# Altium PCB Sensor_Box_CAN_Shutter_CTRL_STM.PCBDOC
Units mm, origin at the board's own origin, x right, y up, seen from the top; angles counter-clockwise.
Board outline 38 x 35.75 mm, 2 copper layers (Top, Bot), stack 1.571 mm thick; 78 components, 56 nets, 242 pads, 101 vias.
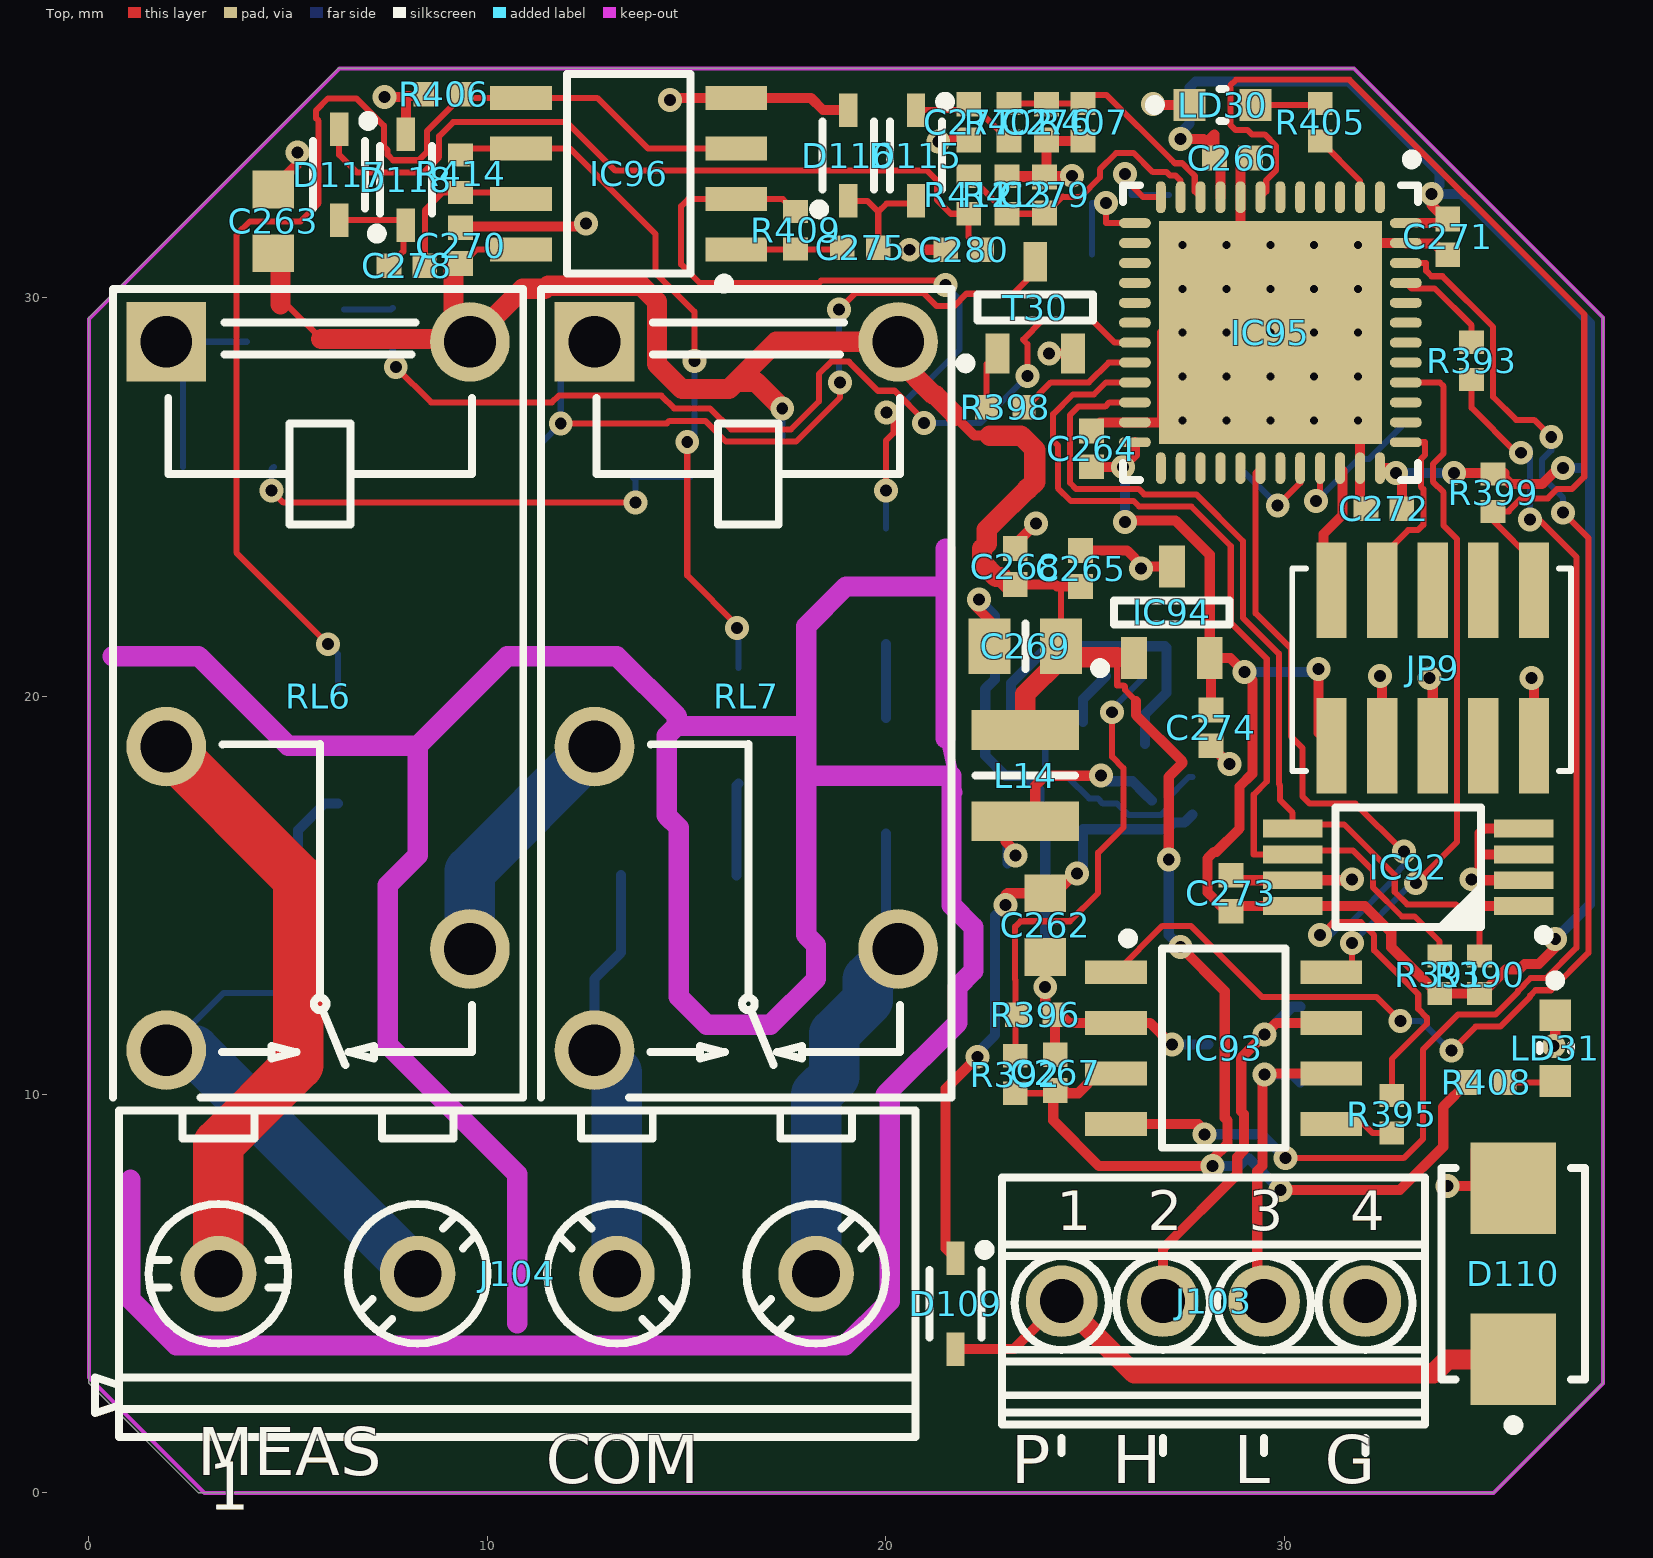
[diagram p0: Top view]
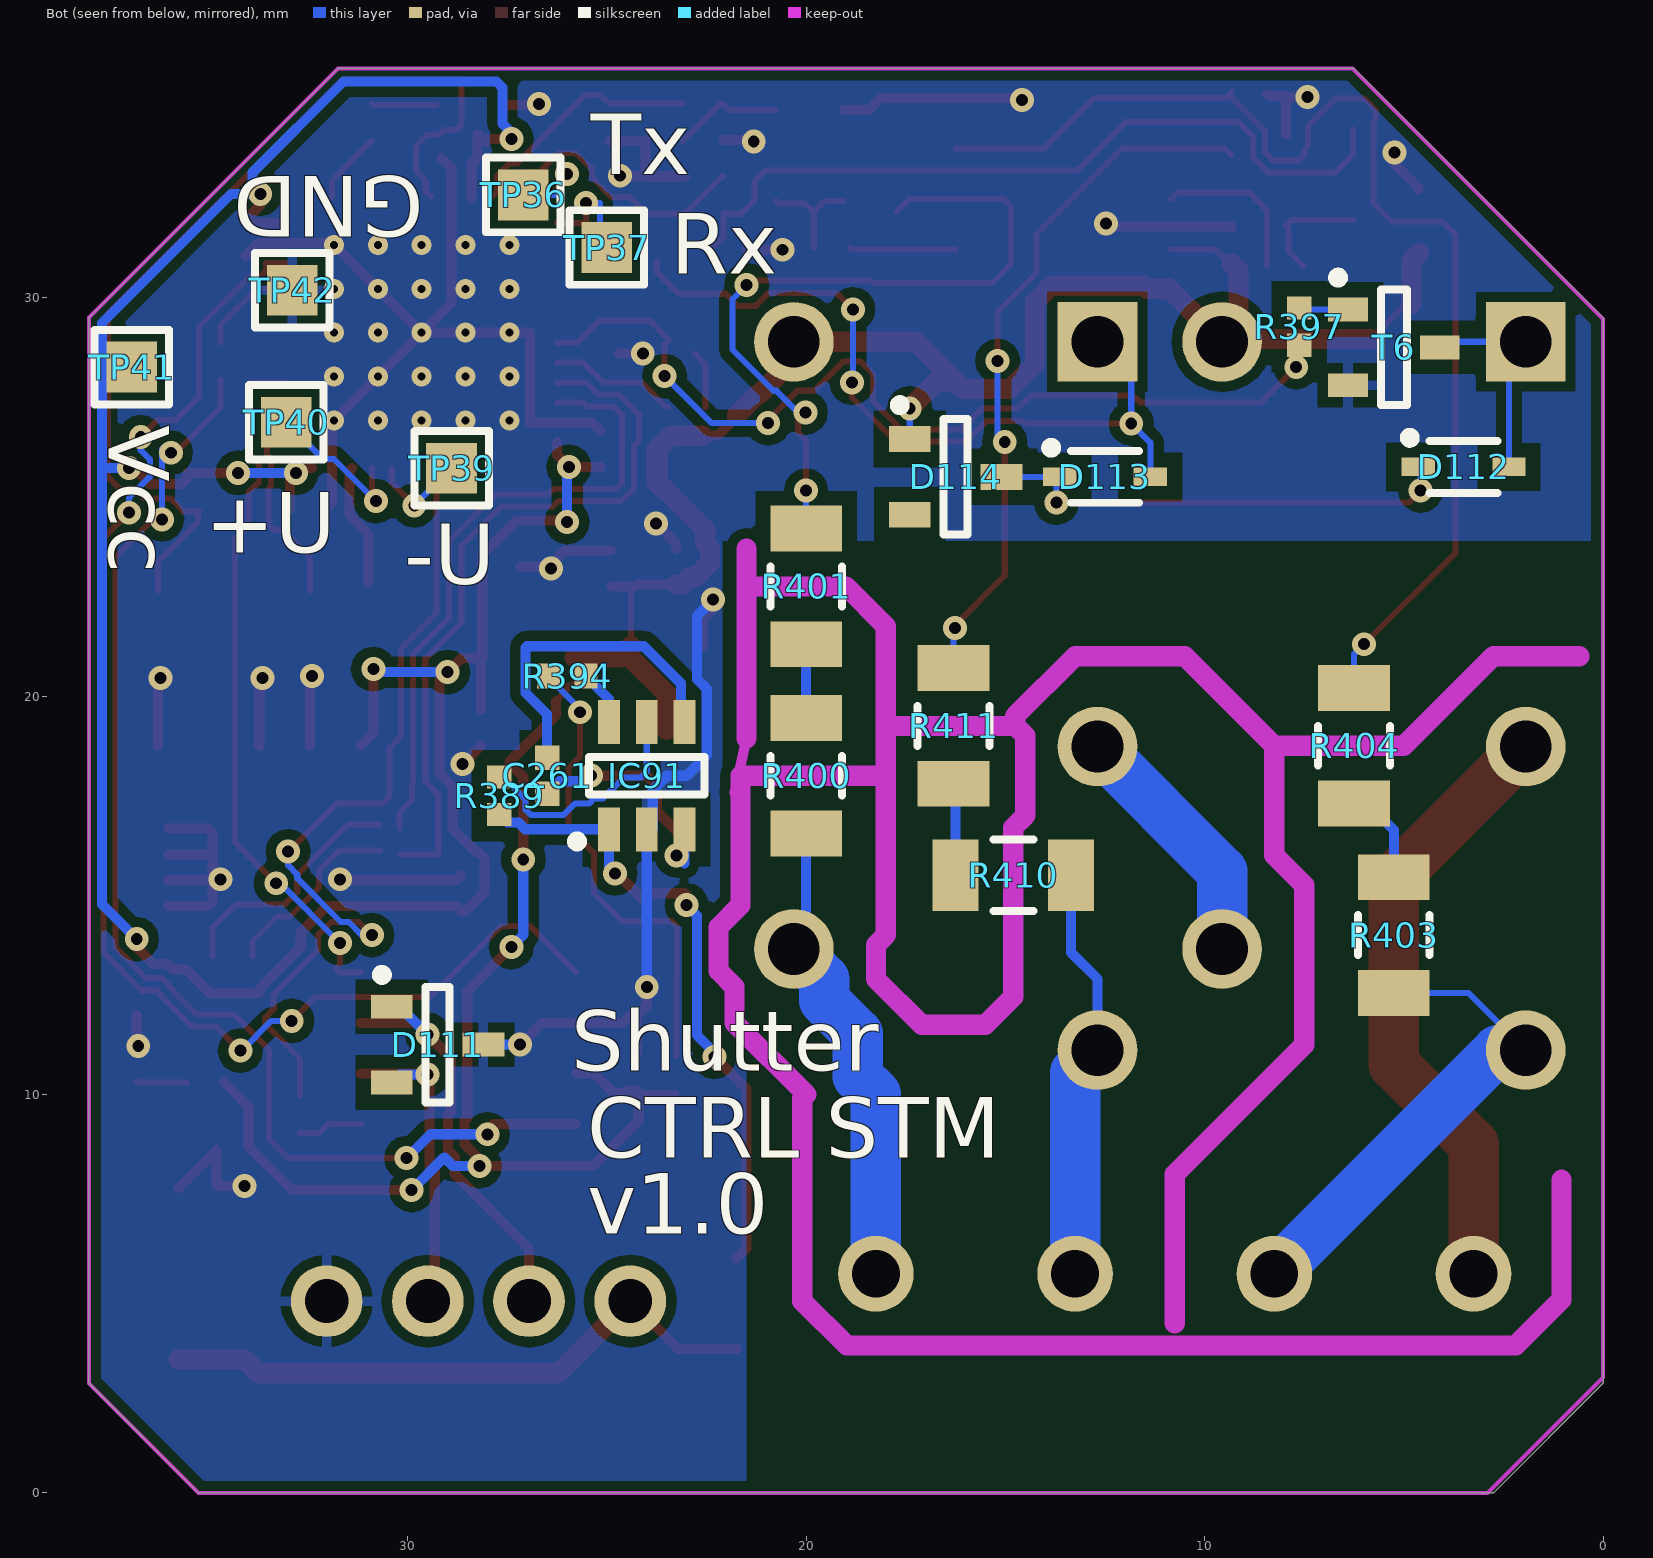
[diagram p1: Bot view, seen from below]
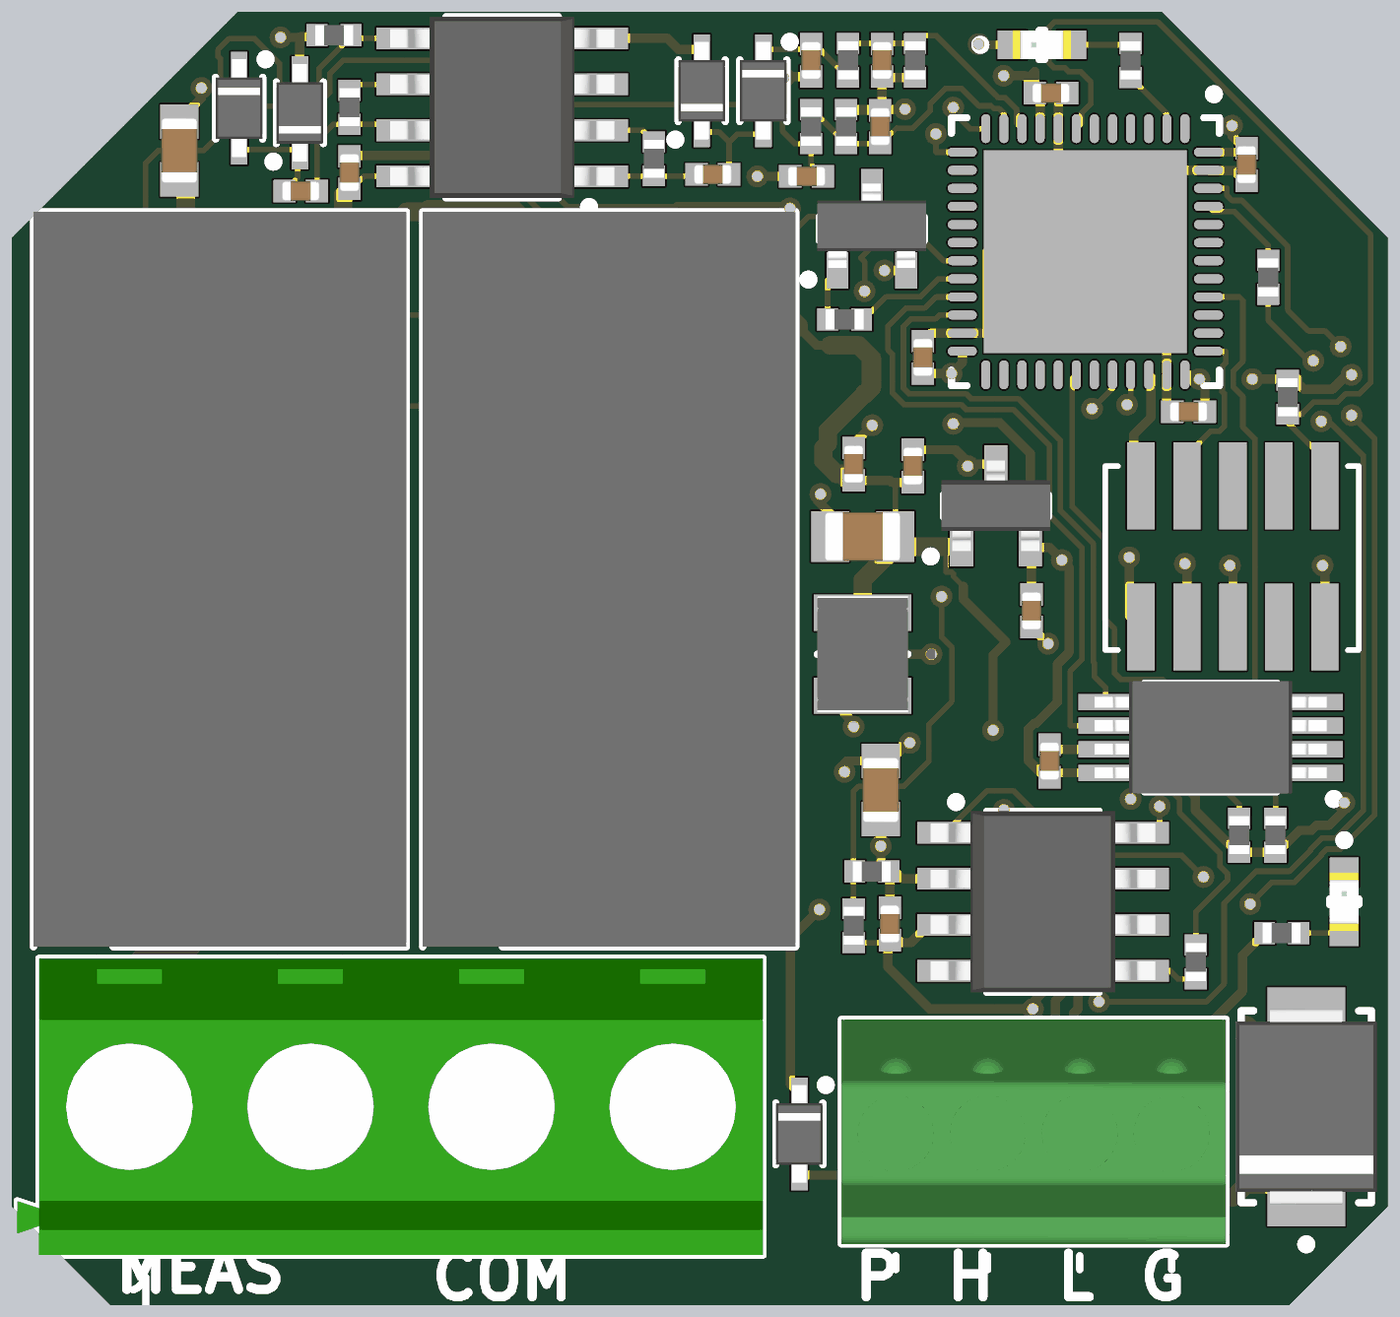
[diagram p2: 3D render of the assembled board from above, using the file's embedded part models]
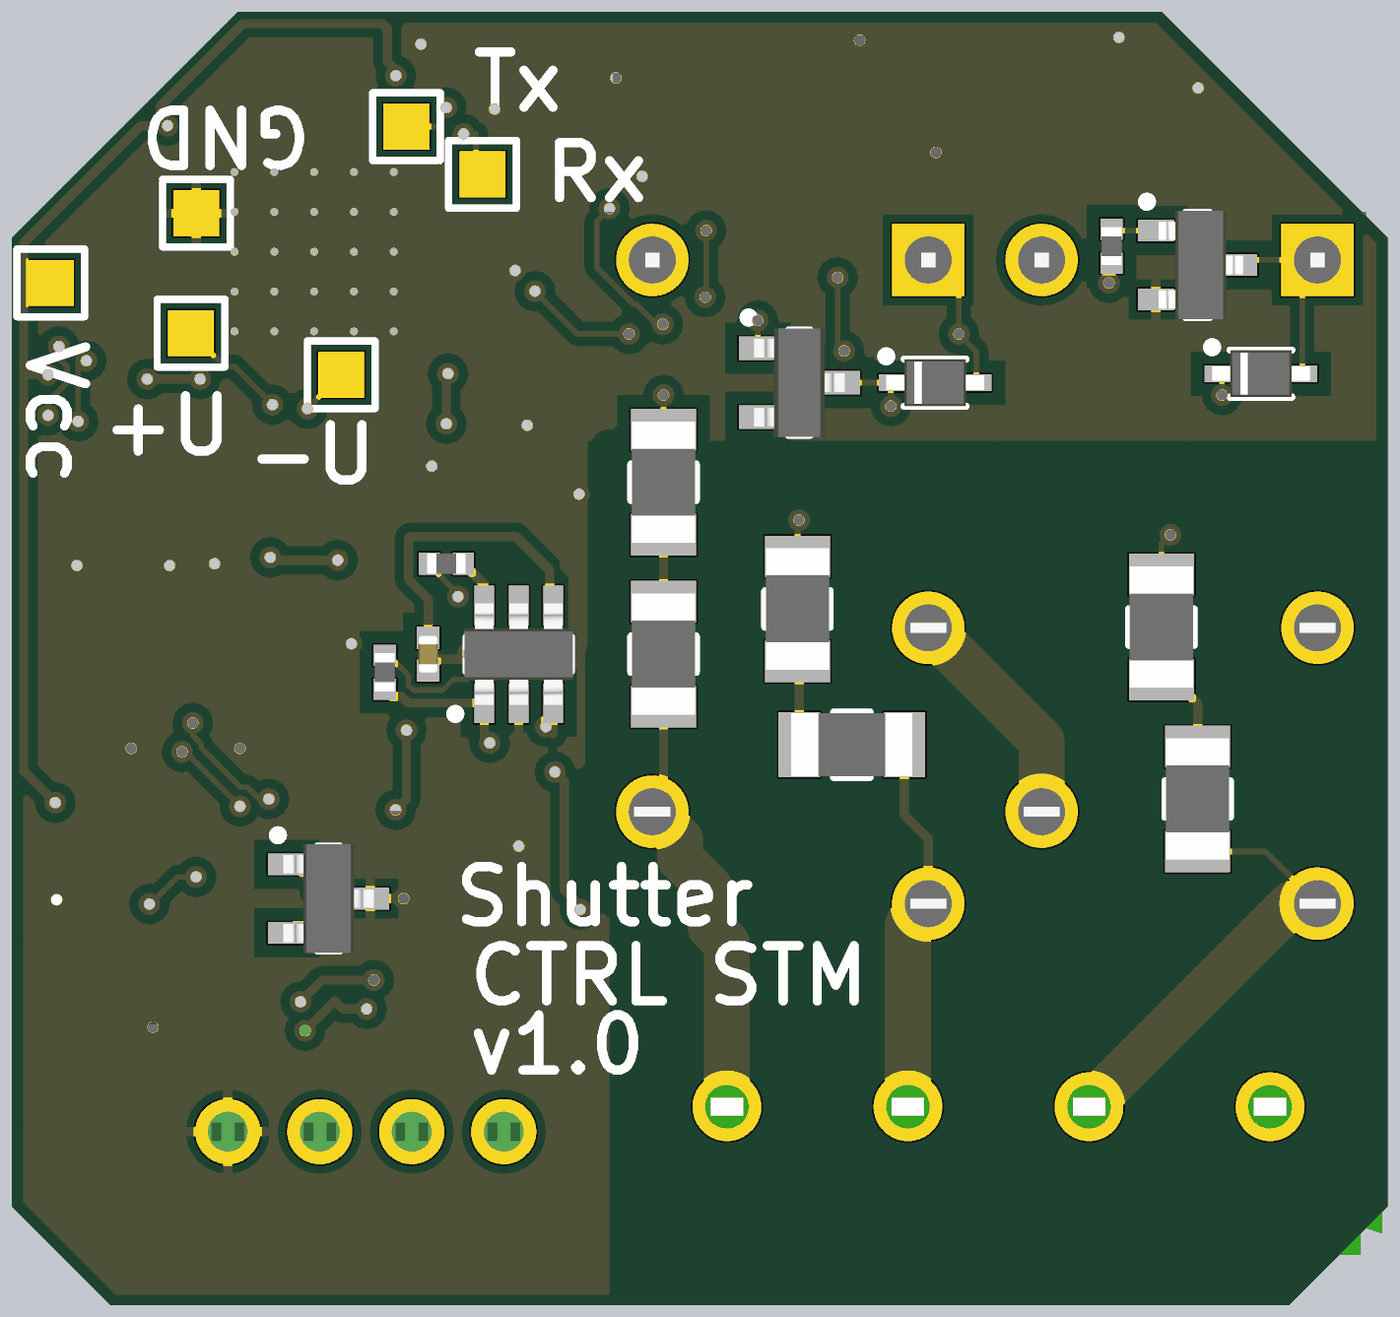
[diagram p3: 3D render of the assembled board from below, using the file's embedded part models]

## Layer stack, top to bottom
TopSolder: solder mask 0.0102, Solder Resist, Dk 3.5
Top: signal copper 0.0356
Dielectric1: core 1.5, FR-4, Dk 4.8
Bot: signal copper 0.0356
BottomSolder: solder mask 0.0102, Solder Resist, Dk 3.5

## Board outline
0,2.75 0,29.5 6.25,35.75 31.75,35.75 38,29.5 38,2.75 35.25,0 2.75,0

## Design rules (kind name [scope] priority, off if disabled: settings)
Clearance [All] p1: gap=0.152 ignorepadtopadclearanceinfootprint=FALSE except(0.254: Arc-Poly Track-Poly THPad-Poly Via-Poly Fill-Poly Poly-Poly Poly-Region Poly-Text Poly-Hole; 0.381: SMDPad-Poly)
ComponentClearance [All] p1: gap=0.254 collisioncheckmode=3 verticalgap=0 showdistances=FALSE
DiffPairsRouting [All] p1: maxlimit=0.254 minlimit=0.127 mostfreqgap=0.127 toplayer_minwidth=0.127 toplayer_maxwidth=0.381 toplayer_prefwidth=0.254 bottomlayer_minwidth=0.127 bottomlayer_maxwidth=0.381 bottomlayer_prefwidth=0.254 maxuncoupledlength=12.7
FabricationTestPointUsage TestPointUsage [All] p1: valid=0 allowmultiple=FALSE
FabricationTestpoint Testpoint [All] p1: side=3 testpointundercomponent=TRUE minsize=1.016 maxsize=2.54 preferedsize=1.524 minholesize=0.508 maxholesize=1.016 preferedholesize=0.813 testpointgrid=0.025 allowsidetop=TRUE allowsidebottom=TRUE usegrid=TRUE gridtolerance=0
HoleSize [All] p1: absolutevalues=TRUE maxlimit=3.81 minlimit=0.025 maxpercent=80.000 minpercent=20.000
HoleToHoleClearance [All] p1: gap=0.025 allowstackedmicrovias=TRUE
MinimumSolderMaskSliver [All] p1: minsoldermaskwidth=0
PlaneClearance [All] p1: clearance=0.254
PlaneConnect [All] p1: planeconnectstyle=Direct reliefexpansion=0.508 reliefentries=4 reliefconductorwidth=0.254 reliefairgap=0.254
PolygonConnect PolygonConnect_pad [(InPadClass('All Pads'))] p1: connectstyle=Relief reliefconductorwidth=0.254 reliefentries=4 polygonreliefangle="90 Angle" airgapwidth=0.254
PolygonConnect [All] p2: connectstyle=Direct reliefconductorwidth=0.254 reliefentries=4 polygonreliefangle="45 Angle" airgapwidth=0.254
RoomDefinition Sensor_Box_CAN_Shutter_CTRL_STM [InComponentClass('Sensor_Box_CAN_Shutter_CTRL_STM')] p1 off: confinementstyle=ConfineIn formatcopy=TRUE lockcomponents=FALSE outline 34.15,-51.85 216.899,-51.85 216.899,-28.1 34.15,-28.1
RoutingVias RoutingVias_PWR [InNetClass('PWR')] p1: holewidth=0.8 width=1.2 viastyle="Through Hole" minholewidth=0.5 minwidth=0.8 maxholewidth=0.8 maxwidth=1.2
RoutingVias [All] p2: holewidth=0.3 width=0.6 viastyle="Through Hole" minholewidth=0.2 minwidth=0.5 maxholewidth=0.5 maxwidth=1
SilkToSilkClearance [All] p1: silktosilkclearance=0
SilkToSolderMaskClearance SilkscreenOverComponentPads [IsPad] p1: minsilkscreentomaskgap=0 clearancetoexposedcopper=TRUE
SolderMaskExpansion [All] p1: expansion=0.051
Width Width_PWR [InNetClass('PWR')] p1: maxlimit=1.27 minlimit=0.254 preferedwidth=0.508
Width [InNetClass('All Nets')] p2: maxlimit=1.27 minlimit=0.152 preferedwidth=0.254
19 further rules are at their usual default settings.

## Components (designator, comment, footprint, x,y, rotation, side; value= is the part's Value field where it differs from the comment)
C261 "1uF" CAPC1005X55N 26.5,18 r270 bottom
C262 "22uF" CAPC1709X100N 24,14.25 r90 top
C263 "22uF" CAPC1709X100N 4.627,31.914 r270 top
C264 "100nF" CAPC1005X55N 25.163,26.2 r270 top
C265 "1uF" CAPC1005X55N 24.887,23.2 r270 top
C266 "1uF" CAPC1005X55N 28.7,33.5 r180 top
C267 "100nF" CAPC1005X55N 24.25,10.55 r270 top
C268 "1uF" CAPC1005X55N 23.25,23.25 r90 top
C269 "10uF" CAPC2012X135N 23.5,21.25 r180 top
C270 "1uF" CAPC1005X55N 9.326,31.304 r270 top
C271 "100nF" CAPC1005X55N 34.1,31.523 r90 top
C272 "100nF" CAPC1005X55N 32.5,24.7 r0 top
C273 "100nF" CAPC1005X55N 28.66,15.05 r270 top
C274 "100nF" CAPC1005X55N 28.16,19.2 r90 top
C275 "1uF" CAPC1005X55N 19.359,31.253 r0 top
C276 "1uF" CAPC1005X55N 24.033,34.403 r270 top
C277 "1uF" CAPC1005X55N 22.077,34.403 r270 top
C278 "1uF" CAPC1005X55N 7.98,30.796 r180 top
C279 "1uF" CAPC1005X55N 23.982,32.574 r90 top
C280 "1uF" CAPC1005X55N 21.95,31.2 r180 top
D109 "1N4148WS" SODFL2512X100N 21.75,4.75 r270 top
D110 "SMBJ15A" DIOM5336X265N 35.75,5.5 r90 top
D111 "PESD1CAN-UX" SOT95P237X112-3N 29.25,11.25 r180 bottom
D112 "1N4148WS" SODFL2512X100N 3.5,25.75 r180 bottom
D113 "1N4148WS" SODFL2512X100N 12.5,25.5 r180 bottom
D114 "BZX84C15" SOT95P240X130-3N 16.25,25.5 r180 bottom
D115 "1N4148WS" SODFL2512X100N 20.756,33.565 r270 top
D116 "1N4148WS" SODFL2512X100N 19.055,33.565 r90 top
D117 "1N4148WS" SODFL2512X100N 6.278,33.082 r270 top
D118 "1N4148WS" SODFL2512X100N 7.955,32.955 r90 top
IC91 "AP65111AWU-7" SOT95P280X100-6N 24,18 r90 bottom
IC92 "M24256-BRDW6" SOP65P640X120-8N 33.111,15.7 r180 top
IC93 "MCP2551-I/SN" SOIC127P600X175-8N 28.478,11.162 r0 top
IC94 "AP7313-33SAG-7" SOT95P240X130-3N 27.178,22.1 r90 top
IC95 "STM32F042C6U6" STM-UFQFPN48_L 29.65,29.119 r270 top
IC96 "LM358AD" SOIC127P600X175-8N 13.543,33.108 r180 top
J103 "=Family" PHOENIX_1725672 28.224,4.812 r0 top
J104 "=Family" TYCO_282836-4 10.75,5.5 r0 top
JP9 "PLHTD10S-TR-CV" PLHTD10S-TR-CV 36.9,20.7 r0 top
L14 "6.8uH" IND_WALSIN_WLPN3030 23.5,18 r90 top
LD30 "Green" LED_KINGBRIGHT_KPH-1608CGCK 28.45,34.832 r0 top
LD31 "Green" LED_KINGBRIGHT_KPH-1608CGCK 36.8,11.162 r270 top
R389 "68k" RESC1005X40N 27.7,17.5 r270 bottom
R390 "1k" RESC1005X40N 34.9,13 r270 top
R391 "1k" RESC1005X40N 33.9,13 r270 top
R392 "68k" RESC1005X40N 23.25,10.5 r270 top
R393 "1k" RESC1005X40N 34.7,28.409 r90 top
R394 "68k" RESC1005X40N 26,20.5 r0 bottom
R395 "1k" RESC1005X40N 32.7,9.5 r90 top
R396 "13k" RESC1005X40N 23.75,12 r180 top
R397 "1k" RESC1005X40N 7.625,29.272 r90 bottom
R398 "1k" RESC1005X40N 23,27.25 r180 top
R399 "10k" RESC1005X40N 35.239,25.1 r270 top
R400 "1M" RESC3216X65N 20,18 r90 bottom
R401 "1M" RESC3216X65N 20,22.75 r90 bottom
R402 "10k" RESC1005X40N 23.093,34.403 r90 top
R403 "1M" RESC3216X65N 5.25,14 r90 bottom
R404 "1M" RESC3216X65N 6.25,18.75 r90 bottom
R405 "10k" RESC1005X40N 30.9,34.4 r90 top
R406 "10k" RESC1005X40N 8.9,35.1 r180 top
R407 "10k" RESC1005X40N 24.947,34.403 r90 top
R408 "10k" RESC1005X40N 35.07,10.3 r0 top
R409 "10k" RESC1005X40N 17.734,31.685 r90 top
R410 "1M" RESC3216X65N 14.8,15.5 r0 bottom
R411 "1M" RESC3216X65N 16.3,19.25 r90 bottom
R412 "10k" RESC1005X40N 22.077,32.574 r90 top
R413 "10k" RESC1005X40N 23.042,32.574 r270 top
R414 "10k" RESC1005X40N 9.326,33.108 r90 top
RL6 "REL_OMRON_G5Q-1" REL_OMRON_G5Q-1 6,20 r270 top value=5VDC
RL7 "REL_OMRON_G5Q-1" REL_OMRON_G5Q-1 16.75,20 r270 top value=5VDC
T6 "BC817-25" SOT95P230X110-3N 5.25,28.75 r180 bottom
T30 "BC817-25" SOT95P230X110-3N 23.75,29.75 r90 top
TP36 "Test Point" TPS127 27.1,32.574 r270 bottom
TP37 "Test Point" TPS127 25,31.256 r270 bottom
TP39 "Test Point" TPS127 28.9,25.719 r90 bottom
TP40 "Test Point" TPS127 33.05,26.869 r90 bottom
TP41 "Test Point" TPS127 36.925,28.256 r270 bottom
TP42 "Test Point" TPS127 32.9,30.182 r270 bottom

## Footprints (in the part's own frame and the unit in brackets; to place one, negate y for a bottom-side part, rotate by r counter-clockwise, add the part's x,y. Pads: shape width x height; smd on the part's side, far side on the other; paste and mask are expansions set on the pad)
CAPC1005X55N [mm] "Chip Capacitor, Body 1.0x0.55mm, IPC Medium Density"
  rect 0.62x0.62 smd: 1(-0.45,0) 2(0.45,0)
  body extent -0.52,-0.27 0.53,0.28, height 0.55
CAPC1709X100N [mm] "Capacitor,non-Polarized, Chip;1.65mm L X 0.85mm W X 1.00mm H, IPC Medium Density"
  rect 0.95x1.05 smd: 1(-0.8,0) 2(0.8,0)
  body extent -0.9,-0.5 0.9,0.5, height 1
CAPC2012X135N [mm] "Chip Capacitor, Body 2.0x1.25mm, IPC Medium Density"
  rect 1.05x1.4 smd: 1(-0.9,0) 2(0.9,0)
  silkscreen extent 0,-0.58 0,0.58, body extent -1.05,-0.67 1.05,0.68, height 1.25
DIOM5336X265N [mm] "DO-214-AA/SMB Diode, Molded Body; 5.34mm L X 3.625mm W X 2.65mm H, IPC Medium Density"
  rect 2.3x2.15 smd: 1(-2.15,0) 2(2.15,0)
  silkscreen extent -3.92,-1.8 2.65,1.8, body extent -2.7,-1.95 2.7,1.95, height 2.4
IND_WALSIN_WLPN3030 [mm] "Miniature Surface Mount Power Inductors, 3mm L X 3mm W X 1.5mm H"
  rect 1x2.7 smd: 1(-1.145,0) 2(1.145,0)
  silkscreen extent 0,-1.25 0,1.25, body extent -1.6,-1.25 1.6,1.25, height 2.3
LED_KINGBRIGHT_KPH-1608CGCK [mm] "SMT Green LED, Case 0603, Body L 1.6 x W 0.8mm H 0.65mm"
  rect 0.8x0.8 smd: 1(-0.825,0) 2(0.825,0)
  silkscreen extent -1.82,-0.4 0.08,0.4, body extent -0.8,-0.4 0.8,0.4, height 0.65
PHOENIX_1725672 [mm] "Micro PCB Terminal Block, Pitch 2.54mm, 4 Positions, Screw Connection"
  round 1.8 hole 1.1: 1(-3.81,0) 2(-1.27,0) 3(1.27,0) 4(3.81,0)
  silkscreen extent -5.31,-3.81 5.31,3.1, body extent -5.31,-3.1 5.31,3.1, height 8.5
PLHTD10S-TR-CV [mm] "SMT 1.27 mm dual goldpin"
  rect 0.76x2.4 smd: 1(-5.715,-1.95) 2(-5.715,1.95) 3(-4.445,-1.95) 4(-4.445,1.95) 5(-3.175,-1.95) 6(-3.175,1.95) 7(-1.905,-1.95) 8(-1.905,1.95) 9(-0.635,-1.95) 10(-0.635,1.95)
  silkscreen extent -6.7,-2.58 0.3,2.5, body extent -6.5,-2.15 0.1,2.15, height 4.5
REL_OMRON_G5Q-1 [mm] "5 Leads, Row Spacing 7.62 mm; Body 20.3mm x 10.3mm OMRON_G5Q-1 Series"
  rect 2x2 hole 1.3: 1(-8.89,-4.06)
  round 2 hole 1.3: 2(1.27,-4.06) 3(8.89,-4.06) 4(6.35,3.56) 5(-8.89,3.56)
  silkscreen extent -10.22,-5.4 10.08,4.9, body extent -10.22,-5.4 10.08,4.9, height 16.2
RESC1005X40N [mm] "Chip Resistor, EIA 0402, Metric 1005, Body 1.0x0.5mm, IPC Medium Density"
  rect 0.58x0.62 smd: 1(-0.47,0) 2(0.47,0)
  body extent -0.52,-0.27 0.53,0.28, height 0.4
RESC3216X65N [mm] "Chip Resistor, EIA 1206, Metric 3216, Body 3.2x1.6mm, IPC Medium Density"
  rect 1.15x1.8 smd: 1(-1.45,0) 2(1.45,0)
  silkscreen extent -0.5,-0.9 0.5,0.9, body extent -1.67,-0.87 1.68,0.88, height 0.65
SODFL2512X100N [mm] "SODFL Diode; 1.70mm W X 1.25mm L X 1.00mm H body, IPC Medium Density"
  rect 0.84x0.46 smd: 1(-1.14,0) 2(1.14,0)
  silkscreen extent -1.47,-0.65 0.85,0.86, body extent -1.35,-0.65 1.35,0.65, height 1
SOIC127P600X175-8N [mm] "SOIC 8, Pitch 1.27mm - Body 4x5mm, IPC Medium Density"
  rect 1.55x0.6 smd: 1(-2.7,1.905) 2(-2.7,0.635) 3(-2.7,-0.635) 4(-2.7,-1.905) 5(2.7,-1.905) 6(2.7,-0.635) 7(2.7,0.635) 8(2.7,1.905)
  silkscreen extent -2.52,-2.5 1.55,2.88, body extent -3.1,-2.5 3.1,2.5, height 1.75
SOP65P640X120-8N [mm] "SOP, 0.65mm pitch; 8 pin, 4.40mm W X 3.00mm L X 1.20mm H body, IPC Medium Density"
  rect 1.5x0.45 smd: 1(-2.9,0.975) 2(-2.9,0.325) 3(-2.9,-0.325) 4(-2.9,-0.975) 5(2.9,-0.975) 6(2.9,-0.325) 7(2.9,0.325) 8(2.9,0.975)
  silkscreen extent -3.53,-1.5 1.83,1.82, body extent -3.2,-1.55 3.2,1.55, height 1.2
SOT95P230X110-3N [mm] "SOT23, 3 pin, Pitch 0.95mm - 1.3mm W X 2.9mm L X 1.1mm H, IPC Medium Density"
  rect 1x0.6 smd: 1(-1.15,0.95) 2(-1.15,-0.95) 3(1.15,0)
  silkscreen extent -1.53,-1.45 0.33,1.87, body extent -1.08,-1.5 1.25,1.5, height 1.1
SOT95P237X112-3N [mm] "SOT, 0.95mm, pitch; 3 pin,1.30mm W X 2.92mm L X 1.12mm H body, IPC Medium Density"
  rect 1.05x0.6 smd: 1(-1.15,0.95) 2(-1.15,-0.95) 3(1.15,0)
  silkscreen extent -1.53,-1.45 0.3,1.87, body extent -1.25,-1.5 1.25,1.5, height 1.1
SOT95P240X130-3N [mm] "SOT23 3-Leads, Pitch 0.95mm - Body 1.3x2.9mm, IPC Medium Density"
  rect 1.05x0.65 smd: 1(-1.15,0.95) 2(-1.15,-0.95) 3(1.15,0)
  silkscreen extent -1.53,-1.45 0.3,1.92, body extent -1.25,-1.5 1.25,1.5, height 1.3
SOT95P280X100-6N [mm] "SOT23, 0.95mm pitch; 6 pin, 1.625mm W X 2.90mm L X 1.00mm H body, IPC Medium Density"
  rect 1.1x0.55 smd: 1(-1.35,0.95) 2(-1.35,0) 3(-1.35,-0.95) 4(1.35,-0.95) 5(1.35,0) 6(1.35,0.95)
  silkscreen extent -1.77,-1.45 0.48,1.88, body extent -1.4,-1.5 1.4,1.5, height 1
STM-UFQFPN48_L [mm] "QFN, 48-Leads, Body 7.1x7.1mm, Pitch 0.5mm, Thermal Pad 5.6x5.6mm, IPC High Density"
  oval 0.8x0.25 smd: 1(-3.4,2.75) 2(-3.4,2.25) 3(-3.4,1.75) 4(-3.4,1.25) 5(-3.4,0.75) 6(-3.4,0.25) 7(-3.4,-0.25) 8(-3.4,-0.75) 9(-3.4,-1.25) 10(-3.4,-1.75) 11(-3.4,-2.25) 12(-3.4,-2.75) 25(3.4,-2.75) 26(3.4,-2.25) 27(3.4,-1.75) 28(3.4,-1.25) 29(3.4,-0.75) 30(3.4,-0.25) 31(3.4,0.25) 32(3.4,0.75) 33(3.4,1.25) 34(3.4,1.75) 35(3.4,2.25) 36(3.4,2.75)
  oval 0.25x0.8 smd: 13(-2.75,-3.4) 14(-2.25,-3.4) 15(-1.75,-3.4) 16(-1.25,-3.4) 17(-0.75,-3.4) 18(-0.25,-3.4) 19(0.25,-3.4) 20(0.75,-3.4) 21(1.25,-3.4) 22(1.75,-3.4) 23(2.25,-3.4) 24(2.75,-3.4) 37(2.75,3.4) 38(2.25,3.4) 39(1.75,3.4) 40(1.25,3.4) 41(0.75,3.4) 42(0.25,3.4) 43(-0.25,3.4) 44(-0.75,3.4) 45(-1.25,3.4) 46(-1.75,3.4) 47(-2.25,3.4) 48(-2.75,3.4)
  rect 5.6x5.6 smd: 49(0,0)
  silkscreen extent -4.47,-3.7 3.7,3.7, body extent -3.55,-3.55 3.55,3.55, height 0.6
TPS127 [mm] "1.27 x  1.27mm SMD Test Point Area"
  rect 1.27x1.27 smd paste-1.27: 1(0,0)
  silkscreen extent -0.94,-0.94 0.94,0.93
TYCO_282836-4 [mm] "15.5A, 300V, Terminal Block, Pitch 5mm, 4 Positions, Screw Connection"
  round 1.9 hole 1.2: 1(-7.5,0) 2(-2.5,0) 3(2.5,0) 4(7.5,0)
  silkscreen extent -10.6,-4.1 10,4.1, body extent -10.6,-4.1 10,4.1, height 10

## Part data
C261 C265 C266 C268 C270 C275 C276 C277 C278 C279 C280: library part CC0402_1UF_16V_10%_X5R, "Non-polarised capacitor", Case=0402, Manufacturer=GENERIC, Manufacturer1 ComponentHeight=0.55mm, Manufacturer1 Example=TDK, Manufacturer1 Part Number=C1005X5R1C105KT, Tolerance=±10%, Voltage=16V, Author="CERN DEM JLC", Component Type=Standard, CreateDate=25.10.2012, HelpURL=\\cern.ch\dfs\Applications\Altium\Datasheets\CC0402_X5R_TDK_C.pdf, LatestRevisionDate=25.10.2012, Manufacturer Part Number=CC0402_1UF_16V_10%_X5R, Mounted=Yes, Part Description="SMD Multilayer Chip Ceramic Capacitor", Part Number=CC0402_1UF_16V_10%_X5R, Pin Count=2, Sense=No, SMD=Yes, Socket=No, Status=Preferred, TC=X5R
C262 C263: library part CC0603_22UF_6.3V_20%_X5R, "Non-polarised capacitor", Case=0603, Manufacturer=GENERIC, Manufacturer1 ComponentHeight=1mm, Manufacturer1 Example=TDK, Manufacturer1 Part Number=C1608X5R0J226M080AC, Tolerance=±20%, Voltage=6.3V, Author="CERN DEM JLC", Component Type=Standard, CreateDate=16.12.2013, HelpURL=\\cern.ch\dfs\Applications\Altium\Datasheets\CC0603_X5R_TDK_C.pdf, LatestRevisionDate=13.09.2016, Manufacturer Part Number=CC0603_22UF_6.3V_20%_X5R, Mounted=Yes, Part Description="SMD Multilayer Chip Ceramic Capacitor", Part Number=CC0603_22UF_6.3V_20%_X5R, Pin Count=2, Sense=No, SMD=Yes, Socket=No, Status=None, TC=X5R
C264 C267 C271 C272 C273 C274: library part CC0402_100NF_16V_10%_X5R, "Non-polarised capacitor", Case=0402, Manufacturer=GENERIC, Manufacturer1 ComponentHeight=0.55mm, Manufacturer1 Example=MURATA, Manufacturer1 Part Number=GRM155R61C104KA88D, Tolerance=±10%, Voltage=16V, Author="CERN DEM JLC", Component Type=Standard, CreateDate=10.12.2013, HelpURL=\\cern.ch\dfs\Applications\Altium\Datasheets\CC0402_X5R_MURATA_GRM.pdf, LatestRevisionDate=10.12.2013, Manufacturer Part Number=CC0402_100NF_16V_10%_X5R, Mounted=Yes, Part Description="SMD Multilayer Chip Ceramic Capacitor", Part Number=CC0402_100NF_16V_10%_X5R, Pin Count=2, Sense=No, SMD=Yes, Socket=No, Status=None, TC=X5R
C269: library part CC0805_10UF_16V_10%_X5R, "Non-polarised capacitor", Case=0805, Manufacturer=GENERIC, Manufacturer1 ComponentHeight=1.4mm, Manufacturer1 Example=KEMET, Manufacturer1 Part Number=C0805C106K4PAC, Tolerance=±10%, Voltage=16V, Author="CERN DEM JLC", Component Type=Standard, CreateDate=03.12.2007, HelpURL=\\cern.ch\dfs\Applications\Altium\Datasheets\CC1206_X5R_KEMET.pdf, LatestRevisionDate=03.12.2007, Manufacturer Part Number=CC0805_10UF_16V_10%_X5R, Mounted=Yes, Part Description="SMD Multilayer Chip Ceramic Capacitor", Part Number=CC0805_10UF_16V_10%_X5R, Pin Count=2, Sense=No, SMD=Yes, Socket=No, Status=Preferred, TC=X5R
D109 D112 D113 D115 D116 D117 D118: "Diode", Case=SOD-323F, Manufacturer="FAIRCHILD SEMICONDUCTOR", Power=150mA, Voltage=75V, Author="CERN DEM JLC", Bonding=No, ComponentHeight=1mm, Component Type=Standard, CreateDate=12.05.2011, Device=1N4148WS, HelpURL=\\cern.ch\dfs\Applications\Altium\Datasheets\1N4148WS.pdf, LatestRevisionDate=12.05.2011, Manufacturer Part Number=1N4148WS, Mounted=Yes, PackageDescription="SODFL Diode; 1.70mm W X 1.25mm L X 1.00mm H body, IPC Medium Density", Part Description="Small Signal Diodes", Part Number=1N4148WS, Pin Count=2, PressFit=No, Sense=No, SMD=Yes, Socket=No
D110: "Zener Diode", Case=DO-214AA, Manufacturer="FAIRCHILD SEMICONDUCTOR", Power=600W, Voltage=15V, Author="CERN DEM JLC", Bonding=No, ComponentHeight=2.65mm, Component Type=Standard, CreateDate=08.12.2008, Device=SMBJ15A, HelpURL=\\cern.ch\dfs\Applications\Altium\Datasheets\SMBJ.pdf, LatestRevisionDate=19.12.2011, Manufacturer Part Number=SMBJ15A, Mounted=Yes, PackageDescription="DO-214-AA/SMB Diode, Molded Body; 5.34mm L X 3.625mm W X 2.65mm H, IPC Medium Density", Part Description="Uni-Directional Transient Voltage Suppressor Diode", Part Number=SMBJ15A, Pin Count=2, PressFit=No, Sense=No, SMD=Yes, Socket=No
D111: "TVS Diode for CAN", Case=SOT-23, Manufacturer=Nexperia, Power=400W, Voltage=24V, Author="CERN DEM JLC", Bonding=No, ComponentHeight=1.12mm, Component Type=Standard, CreateDate=03.09.2014, Device=PESD1CAN-UX, HelpURL=\\cern.ch\dfs\Applications\Altium\Datasheets\SM712.TCT.pdf, LatestRevisionDate=13.01.2015, Manufacturer Part Number=PESD1CAN-UX, Mounted=Yes, PackageDescription="SOT, 0.95mm, pitch; 3 pin,1.30mm W X 2.92mm L X 1.12mm H body, IPC Medium Density", Part Description="TVS Diode for CAN", Part Number=PESD1CAN-UX, Pin Count=3, PressFit=No, Sense=No, SMD=Yes, Socket=No
D114: "Diode Zener Anode Pin 1 Cathode Pin 3 (Pas de pin 2)", Case=SOT23-3, Manufacturer="FAIRCHILD SEMICONDUCTOR", Power=350mW, Voltage=15V, Author="CERN DEM JLC", Bonding=No, ComponentHeight=1.3mm, Component Type=Standard, CreateDate=30.11.2011, Device=BZX84C15, HelpURL=\\cern.ch\dfs\Applications\Altium\Datasheets\BZX84C15.pdf, LatestRevisionDate=30.11.2011, Manufacturer Part Number=BZX84C15, Mounted=Yes, PackageDescription="SOT23 3-Leads, Pitch 0.95mm - Body 1.3x2.9mm, IPC Medium Density", Part Description="Zener Diode", Part Number=BZX84C15, Pin Count=3, PressFit=No, Sense=No, SMD=Yes, Socket=No
IC91: "Light Load Improved 1.5A Synch DC/DC Buck Converter", Case=SOT23-6, Manufacturer="DIODES INCORPORATED", Author="CERN DEM JLC", Bonding=No, ComponentHeight=1.1mm, Component Type=Standard, CreateDate=20.03.2018, Device=AP65111AWU-7, HelpURL=\\cern.ch\dfs\Applications\Altium\Datasheets\AP65111AWU-7.pdf, LatestRevisionDate=20.03.2018, Manufacturer Part Number=AP65111AWU-7, Mounted=Yes, PackageDescription="SOT23, 0.95mm pitch; 6 pin, 1.625mm W X 2.90mm L X 1.00mm H body, IPC Medium Density", Part Description="Light Load Improved 1.5A Synch DC/DC Buck Converter", Part Number=AP65111AWU-7, Pin Count=6, PressFit=No, Sense=No, SMD=Yes, Socket=No
IC92: "256-Kbit Serial I²C Bus EEPROM", Case=TSSOP8, Manufacturer="ST MICROELECTRONICS", Part Number=M24256-BRDW6P, Author="CERN DEM MR", Bonding=No, ComponentHeight=1.2mm, Component Type=Standard, CreateDate=17.03.2016, Device=M24256-BRDW6, HelpURL=\\cern.ch\dfs\Applications\Altium\Datasheets\M24256-BRDW6P.pdf, LatestRevisionDate=17.03.2016, Manufacturer Part Number=M24256-BRDW6, Mounted=Yes, PackageDescription="SOP, 0.65mm pitch; 8 pin, 4.40mm W X 3.00mm L X 1.20mm H body, IPC Medium Density", Part Description="256-Kbit Serial I²C Bus EEPROM", Pin Count=8, PressFit=No, Sense=No, SMD=Yes, Socket=No
IC93: "High-Speed CAN Transceiver, 8-Pin SOIC, Industrial Temperature", Case=SOIC8, Manufacturer="MICROCHIP TECHNOLOGY", Author=GK, Bonding=No, ComponentHeight=1.75mm, Component Type=Standard, CreateDate=07.09.2016, Device=MCP2551-I/SN, LatestRevisionDate=07.09.2016, Manufacturer Part Number=MCP2551-I/SN, Mounted=Yes, PackageDescription="SOIC 8, Pitch 1.27mm - Body 4x5mm, IPC Medium Density", Part Description="High-Speed CAN Transceiver", Part Number=MCP2551-I/SN, Pin Count=8, PressFit=No, Sense=No, SMD=Yes, Socket=No
IC94: "3-Terminal Regulator 1=IN 2=OUT 3=GND", Case=SOT23, Manufacturer="DIODES INCORPORATED", Author="CERN DEM JLC", Bonding=No, ComponentHeight=1.35mm, Component Type=Standard, CreateDate=20.03.2018, Device=AP7313-33SAG-7, HelpURL=\\cern.ch\dfs\Applications\Altium\Datasheets\AP7313-33SAG-7.pdf, LatestRevisionDate=20.03.2018, Manufacturer Part Number=AP7313-33SAG-7, Mounted=Yes, PackageDescription="SOT23 3-Leads, Pitch 0.95mm - Body 1.3x2.9mm, IPC Medium Density", Part Description="3.3V, 150mA Low Quiescent Current, Fast Transient Low Dropout Linear Regulator", Part Number=AP7313-33SAG-7, Pin Count=3, PressFit=No, Sense=No, SMD=Yes, Socket=No
IC95: library part CMP-0304-00104-1, "ARM Cortex-M0 32-bit MCU, 32 KB Flash, 6 KB Internal RAM, 38 I/Os, 48-Pin UFQFPN, -40 to 85 degC, Tray", I/Os (High Current)=38, Operating Frequency(F) (Processor speed) (MHz)=48, Package Description="48-Pin Ultra Thin Fine Pitch Quad Flat No-Lead, 7 x 7 x 0.6 mm Body, 0.5 mm Pitch, Exposed Pad", Package Reference=UFQFPN48, Supply Voltage(Vcc) min (V)=2, ComponentLink1Description="Manufacturer URL", ComponentLink1URL=http://www.st.com/, ComponentLink2Description=Datasheet, ComponentLink2URL=http://www.st.com/st-web-ui/static/active/en/resource/technical/document/datasheet/DM00105814.pdf, Core="ARM Cortex-M0", DatasheetVersion="Rev. 5", FLASH Size (Prog) (kB)=32, Internal RAM Size (kB)=6, Mounting Technology="Surface Mount", Packing=Tray
IC96: "Dual Operational Amplifier", Case=SOIC8, Manufacturer="TEXAS INSTRUMENTS", Author="CERN DEM JLC", Bonding=No, ComponentHeight=1.75mm, Component Type=Standard, CreateDate=02.12.2008, Device=LM358AD, HelpURL=\\cern.ch\dfs\Applications\Altium\Datasheets\LM358AD.pdf, LatestRevisionDate=13.04.2010, Manufacturer Part Number=LM358AD, Mounted=Yes, PackageDescription="SOIC 8, Pitch 1.27mm - Body 4x5mm, IPC Medium Density", Part Description="Dual Operational Amplifier", Part Number=LM358AD, Pin Count=8, PressFit=No, Sense=No, SMD=Yes, Socket=No
J103: library part PHOENIX_1725672, "Terminal Block, 4 Positions, Screw Connection", Manufacturer="PHOENIX CONTACT", Manufacturer Part Number="1725672 (MPT 0,5/4-2,54)", Author="CERN DEM JMW", ComponentHeight=8.5mm, Component Type=Standard, CreateDate=07.11.2008, HelpURL=\\cern.ch\dfs\Applications\Altium\Datasheets\PHOENIX_1725672.pdf, LatestRevisionDate=26.04.2010, Mounted=Yes, Part Description="6A, 63V, Terminal Block, Pitch 2.54mm, 4 Positions, Screw Connection", Part Number=PHOENIX_1725672, Pin Count=4, PressFit=No, Sense=No, SMD=No, Socket=No, Status=None
J104: library part TYCO_282836-4, "Terminal Block, 4 Positions, Screw Connection", Manufacturer="TYCO ELECTRONICS", Manufacturer Part Number=282836-4, Author="CERN DEM JLC", ComponentHeight=10mm, Component Type=Standard, CreateDate=10.11.2014, HelpURL=\\cern.ch\dfs\Applications\Altium\Datasheets\TYCO_282836-4.pdf, LatestRevisionDate=10.11.2014, Mounted=Yes, Part Description="15.5A, 300V, Terminal Block, Pitch 5mm, 4 Positions, Screw Connection", Part Number=TYCO_282836-4, Pin Count=4, PressFit=No, Sense=No, SMD=No, Socket=No, Status=None
JP9: library part "CON_2x5 1.27 SMT Male", "1.27 mm dual row goldpin (Maritex)"
L14: "6,8uH; 900mA; 0,211O; 3x3x1,5mm", Manufacturer=WALSIN, Manufacturer Part Number=WLPN303015M6R8PB, Part Number=IND_6.8UH_20%_WALSIN_WLPN303015M6R8PB, Power=900mA, Resistance=0.21R, Tolerance=±20%, Author=GK, ComponentHeight=1.5, Component Type=Standard, CreateDate=11.07.2016, HelpURL=\\cern.ch\dfs\Applications\Altium\Datasheets\IND_MURATA-PS_8200.pdf, LatestRevisionDate=11.07.2016, Mounted=Yes, Part Description="Miniature Surface Mount Power Inductor (8200 Series)", Pin Count=2, Sense=No, SMD=Yes, Socket=No, Status=None
LD30 LD31: library part LED_KINGBRIGHT_KPH-1608CGCK, "LED Green 1C 2A", Manufacturer=KINGBRIGHT, Manufacturer Part Number=KPH-1608CGCK, Author="CERN DEM JLC", Bonding=No, Color=Green, ComponentHeight=0.65mm, Component Type=Standard, CreateDate=03.07.2017, HelpURL=\\cern.ch\dfs\Applications\Altium\Datasheets\LED_KINGBRIGHT_KPH-1608CGCK.pdf, LatestRevisionDate=03.07.2017, Mounted=Yes, PackageDescription="SMT Green LED, Case 0603, Body L 1.6 x W 0.8mm H 0.65mm", Part Description="SMD Green LED, Case 1.6mmX0.8mm(0603), 0.65mm Thickness", Part Number=LED_KINGBRIGHT_KPH-1608CGCK, Pin Count=2, PressFit=No, Sense=No, SMD=Yes, Socket=No
R389 R392 R394: library part R0402_68K_1%_0.0625W_100PPM, "Resistor - 1%", Case=0402, Manufacturer=GENERIC, Manufacturer1 ComponentHeight=0.4mm, Manufacturer1 Example="YAGEO PHYCOMP", Manufacturer1 Part Number=232270676803L, Power=0.0625W, Tolerance=±1%, Author="CERN DEM JLC", Component Type=Standard, CreateDate=03.12.2007, HelpURL=\\cern.ch\dfs\Applications\Altium\Datasheets\R0402_Phycomp_RC0402.pdf, LatestRevisionDate=17.10.2012, Manufacturer Part Number=R0402_68K_1%_0.0625W_100PPM, Mounted=Yes, Part Description="General Purpose Thick Film Chip Resistor", Part Number=R0402_68K_1%_0.0625W_100PPM, Pin Count=2, PressFit=No, Sense=No, SMD=Yes, Socket=No, Status="Not Recommended", TC=±100ppm/°C
R390 R391 R393 R395 R397 R398: library part R0402_1K_1%_0.0625W_100PPM, "Resistor - 1%", Case=0402, Manufacturer=GENERIC, Manufacturer1 ComponentHeight=0.4mm, Manufacturer1 Example="YAGEO PHYCOMP", Manufacturer1 Part Number=232270671002L, Power=0.0625W, Tolerance=±1%, Author="CERN DEM JLC", Component Type=Standard, CreateDate=03.12.2007, HelpURL=\\cern.ch\dfs\Applications\Altium\Datasheets\R0402_Phycomp_RC0402.pdf, LatestRevisionDate=17.10.2012, Manufacturer Part Number=R0402_1K_1%_0.0625W_100PPM, Mounted=Yes, Part Description="General Purpose Thick Film Chip Resistor", Part Number=R0402_1K_1%_0.0625W_100PPM, Pin Count=2, PressFit=No, Sense=No, SMD=Yes, Socket=No, Status="Not Recommended", TC=±100ppm/°C
R396: library part R0402_13K_1%_0.0625W_100PPM, "Resistor - 1%", Case=0402, Manufacturer=GENERIC, Manufacturer1 ComponentHeight=0.4mm, Manufacturer1 Example="YAGEO PHYCOMP", Manufacturer1 Part Number=232270671303L, Power=0.0625W, Tolerance=±1%, Author="CERN DEM JLC", Component Type=Standard, CreateDate=03.12.2007, HelpURL=\\cern.ch\dfs\Applications\Altium\Datasheets\R0402_Phycomp_RC0402.pdf, LatestRevisionDate=17.10.2012, Manufacturer Part Number=R0402_13K_1%_0.0625W_100PPM, Mounted=Yes, Part Description="General Purpose Thick Film Chip Resistor", Part Number=R0402_13K_1%_0.0625W_100PPM, Pin Count=2, PressFit=No, Sense=No, SMD=Yes, Socket=No, Status="Not Recommended", TC=±100ppm/°C
R399 R402 R405 R406 R407 R408 R409 R412 R413 R414: library part R0402_10K_1%_0.0625W_100PPM, "Resistor - 1%", Case=0402, Manufacturer=GENERIC, Manufacturer1 ComponentHeight=0.4mm, Manufacturer1 Example="YAGEO PHYCOMP", Manufacturer1 Part Number=232270671003L, Power=0.0625W, Tolerance=±1%, Author="CERN DEM JLC", Component Type=Standard, HelpURL=\\cern.ch\dfs\Applications\Altium\Datasheets\R0402_Phycomp_RC0402.pdf, Manufacturer Part Number=R0402_10K_1%_0.0625W_100PPM, Mounted=Yes, Part Description="General Purpose Thick Film Chip Resistor", Part Number=R0402_10K_1%_0.0625W_100PPM, Pin Count=2, SMD=Yes, Socket=No, TC=±100ppm/°C
  R399 R405 R408: CreateDate=03.12.2007, LatestRevisionDate=17.10.2012, PressFit=No, Sense=No, Status="Not Recommended"
  R402 R406 R407 R409 R412 R413 R414: CreateDate=2007-12-03, LatestRevisionDate=2012-10-17, Status="Not recommended", Table="Resistors SMD"
R400 R401 R403 R404 R410 R411: library part R1206_1M_1%_0.25W_100PPM, "Resistor - 1%", Case=1206, Manufacturer=GENERIC, Manufacturer1 ComponentHeight=0.65mm, Manufacturer1 Example="NIC COMPONENT", Manufacturer1 Part Number=NRC12F1004TRF, Power=0.25W, Tolerance=±1%, Author="CERN DEM JLC", Component Type=Standard, CreateDate=03.12.2007, HelpURL=\\cern.ch\dfs\Applications\Altium\Datasheets\R1206_NIC_NRC.pdf, LatestRevisionDate=13.03.2008, Manufacturer Part Number=R1206_1M_1%_0.25W_100PPM, Mounted=Yes, Part Description="General Purpose Thick Film Chip Resistor", Part Number=R1206_1M_1%_0.25W_100PPM, Pin Count=2, PressFit=No, Sense=No, SMD=Yes, Socket=No, Status=Preferred, TC=±100ppm/°C
RL6 RL7: library part REL_OMRON_G5Q-1-5VDC, "SPDT, Power Relay, 10A Switching Capacity, G5Q-1 Series", Manufacturer="OMRON ELECTRONIC", Manufacturer Part Number=G5Q-1-DC5, Author="CERN DEM MR", ComponentHeight=15.8mm, Component Type=Standard, CreateDate=09.06.2016, HelpURL=\\cern.ch\dfs\Applications\Altium\Datasheets\REL_OMRON_G5Q-1.pdf, LatestRevisionDate=09.06.2016, Mounted=Yes, PackageDescription="5 Leads, Row Spacing 7.62mm; Body 20.3mm x 10.3mm, OMRON_G5Q-1 Series", Part Description="SPDT, Power Relay, 10A Switching Capacity, G5Q-1 Series", Part Number=REL_OMRON_G5Q-1-5VDC, Pin Count=5, PressFit=No, Sense=No, SMD=No, Socket=No, Status=None
T6 T30: "NPN Transistor", Case=SOT23-3, Manufacturer="NXP SEMICONDUCTORS", Author="CERN DEM JLC", Bonding=No, ComponentHeight=1.1mm, Component Type=Standard, CreateDate=28.10.2014, Device=BC817-25, HelpURL=\\cern.ch\dfs\Applications\Altium\Datasheets\BC817-25.pdf, LatestRevisionDate=28.10.2014, Manufacturer Part Number=BC817-25, Mounted=Yes, PackageDescription="SOT23, 3 pin, Pitch 0.95mm - 1.3mm W X 2.9mm L X 1.1mm H, IPC Medium Density", Part Description="45V 500mA NPN General-Purpose Transistor", Part Number=BC817-25, Pin Count=3, PressFit=No, Sense=No, SMD=Yes, Socket=No
TP36 TP37 TP39 TP40 TP41 TP42: library part SMD_PAD_1.27X1.27MM, Author="CERN DEM JLC", ComponentHeight=0mm, Component Type="Standard (No BOM)", CreateDate=12.01.2008, Family="Test Point", HelpURL=Undefined, LatestRevisionDate=12.01.2008, Mounted=No, PackageDescription="1.27mm x 1.27mm PCB Copper Area (SMD Test Point)", Part Description="1.27mm x 1.27mm PCB Copper Area (SMD Test Point)", Part Number=SMD_PAD_1.27X1.27MM, Pin Count=1, Sense=No, SMD=Yes, Socket=No, Status=None

## Via types
v1: diameter 0.6, hole 0.3, Top to Bot, tented both sides, 76 vias
v2: diameter 0.5, hole 0.2, Top to Bot, tented both sides, 25 vias

## Nets (pads, with @x,y where several pads share a name; then routed paths per layer and width w, separated by ;. In a path a pad name is that pad's centre, name@x,y a point inside that pad or via, vN(x,y) a via of type N, cw(c..) or ccw(c..) an arc to the next point about the centre after c; other vN are vias at no path point)
AC_MEAS1: C276.1 IC95.10 R402.2 R407.2 | length 6.2
  Top w0.152: R402.2 R407.2 25.163,35.089 25.536,35.089 27.173,33.452 27.253,33.371 27.434,33.371 27.754,33.052 27.754,32.665 IC95.10
AC_MEAS2: C279.1 IC95.11 R412.2 R413.2 | length 7.2
  Top w0.152: R412.2 22.102,33.044 R413.2 23.962,32.104 C279.1 24.025,32.124 24.439,32.538 24.449,32.528 24.887,32.528 25.371,33.013 25.371,33.219 25.781,33.629 26.219,33.629 26.7,33.147 27.046,33.147 27.127,33.067 27.268,33.067 27.4,32.934 IC95.11
CAN_MOD: IC93.8 IC95.40 | length 17.8
  Top w0.152: IC93.8 31.701,13.067 31.8,13.166 31.7,13.266 v1(31.7,13.8) ; IC95.40 33.904,27.869 34,27.772 34,26.088 33.731,25.819 33.731,25.381 34,25.112 34,24.278 34.334,23.945 34.334,16.334 v1(33.3,15.3)
  Bot w0.152: v1(31.7,13.8) 33.2,15.3 v1(33.3,15.3)
CAN_MOD2: IC95.30 R395.2 | length 21.7
  Top w0.152: IC95.30 29.282,25.6 29.282,22.075 30.17,21.187 30.17,18.979 30.459,18.69 30.459,17.476 30.635,17.3 31.784,17.3 32.984,16.1 v1(33,16.1) ; v1(30.9,14) 31.229,14.329 31.919,14.329 32.254,13.994 32.254,13.618 33.361,12.511 33.361,12.145 33.579,11.928 33.579,11.768 32.7,10.889 R395.2
  Bot w0.152: v1(30.9,14) 31.152,14 31.481,14.329 31.679,14.329 32.771,15.421 32.771,15.519 33,15.747 v1(33,16.1)
CAN_RX: IC95.45 R393.2 | length 2.5
  Top w0.152: IC95.45 33.189,30.229 33.771,30.229 34.7,29.3 R393.2
CAN_TX: IC93.1 IC95.46 | length 34.8
  Top w0.152: IC93.1 26.94,14.229 27.657,14.229 29.436,12.45 32.309,12.45 v1(32.911,11.848) ; IC95.46 33.561,30.869 33.561,30.668 33.695,30.534 33.968,30.534 35.239,29.263 35.239,27.511 35.821,26.929 36.271,26.929 v1(36.7,26.5) ; v1(34.2,11.1) 34.8,11.7 35.424,11.7 36.171,12.447 36.171,12.482 36.305,12.616 36.694,12.616 37.633,13.555 37.633,23.967 v1(37,24.6)
  Bot w0.152: v1(32.911,11.848) 33.42,11.848 34.168,11.1 v1(34.2,11.1) ; v1(36.7,26.5) 36.7,26.166 36.471,25.938 36.471,25.5 37,24.971 v1(37,24.6)
CAN_USB_N: IC95.32 TP39.1 | length 2.5
  Top w0.152: v1(29.835,24.784) 30.4,25.349 IC95.32
  Bot w0.152: TP39.1 v1(29.835,24.784)
CAN_USB_P: IC95.33 TP40.1 | length 3.9
  Top w0.152: v1(30.8,24.894) 30.9,24.994 IC95.33
  Bot w0.152: v1(30.8,24.894) 31.85,25.944 32.125,25.944 TP40.1
CANH: D111.1 IC93.7 J103.2 | length 10.8
  Top w0.254: J103.2 26.954,6.135 28.819,8 28.819,8.425 28.986,8.592 28.986,9.508 28.921,9.574 28.921,10.921 v1(29.5,11.5) 29.797,11.797 IC93.7
  Bot w0.254: v1(29.5,11.5) 30.2,12.2 D111.1
CANL: D111.2 IC93.6 J103.3 | length 8.5
  Top w0.254: J103.3 29.321,4.985 29.321,8.075 29.449,8.203 29.449,10.449 v1(29.5,10.5) 29.527,10.527 IC93.6
  Bot w0.254: v1(29.5,10.5) 30.2,10.5 D111.2
GND: C262.1 C263.1 C264.1 C265.1 C266.1 C267.1 C268.2 C269.2 C270.1 C271.1 C272.1 C273.1 C274.1 C276.2 C277.2 C279.2 C280.2 D110.2 D111.3 D116.2 D118.2 IC91.2 IC92.1 IC92.2 IC92.3 IC92.4 IC92.7 IC93.2 IC94.3 IC95.8 IC95.23 IC95.35 IC95.47 IC95.49 IC96.4 J103.4 JP9.3 JP9.5 JP9.9 LD30.1 LD31.1 R396.1 R406.2 R407.1 R413.1 T6.2 T30.2 TP42.1 | length 81.9
  Top w0.254: C263.1 4.627,32.752 5.237,33.362 v1(5.237,33.641) ; v1(7.421,35.038) 7.938,35.038 7.955,35.055 ; D118.2 7.955,35.055 ; R406.2 8.385,35.055 7.955,35.055 ; C270.1 9.326,31.782 12.395,31.782 v1(12.476,31.863) ; v1(14.584,34.962) 14.635,35.013 IC96.4 18.115,35.013 18.423,34.705 D116.2 ; v1(20.59,31.2) C280.2 ; v1(21.315,33.92) 21.348,33.953 C277.2 ; v1(22.333,22.423) 22.333,22.333 22.25,22.25 22.6,21.9 C269.2 ; C268.2 23.25,23.81 v1(23.765,24.325) ; v1(24,12.7) 24,12.22 R396.1 ; v1(24.1,28.6) T30.2 ; C267.1 24.25,11.97 R396.1 ; v1(24.668,33.057) 24.655,33.044 C279.2@24.002,33.044 ; C265.1 26.055,23.65 26.455,23.25 IC94.3 ; R407.1 24.053,33.933 C276.2 24.033,33.075 C279.2@24.002,33.044 ; C264.1 25.378,26.865 26.929,26.865 26.929,29.119 v2(27.45,29.119) v2(28.55,29.119) v2(29.65,29.119) ; v1(26.7,34.853) 26.721,34.832 LD30.1 ; v1(27.178,11.25) 26.631,11.797 IC93.2 24.597,11.797 24.394,12 R396.1 ; C274.1 v1(28.62,18.29) ; C273.1 28.785,15.375 IC92.7 31.675,15.375 v1(31.7,15.4) ; C266.1 28.9,33.25 IC95.8 28.9,31.319 28.9,29.869 v2(29.65,29.119) ; C272.1 31.9,24.85 IC95.35 31.9,26.869 v2(30.75,28.019) v2(29.65,29.119) ; v1(32.4,20.5) 32.455,20.445 JP9.3 ; v1(33.64,20.45) 33.725,20.365 JP9.5 ; C271.1@34.07,31.05 33.759,31.361 33.05,31.361 IC95.47 31.9,31.369 v2(31.85,31.319) v2(30.75,30.219) v2(29.65,29.119) ; v1(34.1,7.7) 34.8,7.7 34.8,8.6 D110.2 ; v1(34.7,15.4) 34.725,15.375 v1@34.9,15.375 ; v1@34.9,15.4 34.9,16.1 ; IC92.1 35.011,14.725 34.9,14.836 v1@34.9,15.375 ; IC92.2 v1@34.9,15.375 ; IC92.3 34.975,16.025 34.9,16.1 ; IC92.4 35.011,16.675 34.9,16.564 34.9,16.1 ; v1(36.2,20.45) 36.265,20.385 JP9.9 ; v1@36.8,11.256 LD31.1 ; C279.2@24.002,33.044 R413.1 23.062,33.024 C279.2 C279.2@24.002,33.044
  Bot w0.254: v1@22.382,22.368 22.737,22.013 22.737,20.421 22.496,20.179 22.496,18.504 23,18 23.5,18 23.85,17.65 23.85,16.65 IC91.2 v1(24,12.7) ; v1(27.178,11.25) D111.3
  other v1: 36.763,11.219 26.4,23.195
  other v2: 27.45,26.919 28.55,26.919 29.65,26.919 30.75,26.919 31.85,26.919 27.45,28.019 28.55,28.019 29.65,28.019 31.85,28.019 30.75,29.119 31.85,29.119 27.45,30.219 28.55,30.219 29.65,30.219 31.85,30.219 27.45,31.319 28.55,31.319 29.65,31.319 30.75,31.319
LED: IC95.2 R405.1 | length 1.8
  Top w0.152: R405.1 31.9,32.93 IC95.2
NetC261_1: C261.1 IC91.4 | length 7.9
  Bot w0.254: IC91.4 23.144,19.444 23.144,20.319 24.075,21.25 27,21.25 27.039,21.211 27.039,20.074 26.5,19.535 26.5,18.8
NetC261_2: C261.2 IC91.3 L14.1 | length 6.6
  Top w0.254: v1(23.25,16) 23.25,16.105 23,16.355 L14.1 23.75,17.105 23.75,17.75 24,18 v1(25.4,18)
  Bot w0.254: IC91.3 23.05,15.8 v1(23.25,16) ; v1(25.4,18) 25.539,17.861 26.189,17.861 C261.2 C261.2@26.675,17.375
NetC262_2: C262.2 D109.1 IC91.1 R389.2 | length 15.9
  Top w0.254: D109.1 21.5,6.14 21.5,10.142 v1(22.304,10.946) ; v1(23,14.75) 23,15 23.05,15.05 C262.2 ; C262.2@24.125,14.925 24.75,15.55 v1(24.8,15.55)
  Bot w0.254: v1(22.304,10.946) 22.304,11.054 22.737,11.487 22.737,14.487 v1(23,14.75) ; v1(24.8,15.55) 24.95,15.7 IC91.1 24.956,16.656 27.052,16.656 27.226,16.829 27.499,16.829 R389.2
NetC275_1: C275.1 IC96.1 R409.1 | length 2.7
  Top w0.152: IC96.1 18.859,31.203 C275.1
NetC275_2: C275.2 D115.2 D116.1 | length 2.8
  Top w0.152: D116.1 19.534,32.425 19.809,32.15 ; C275.2 19.809,32.15 ; D115.2 20.692,32.36 20.02,32.36 19.809,32.15
NetC277_1: C277.1 D115.1 R402.1 | length 2.8
  Top w0.152: D115.1 21.929,34.705 C277.1 22.173,34.853 R402.1
NetC278_1: C278.1 IC96.7 R414.1 | length 4.1
  Top w0.152: C278.1 8.43,32.186 8.882,32.638 R414.1 10.678,32.638 IC96.7
NetC278_2: C278.2 D117.2 D118.1 | length 2.9
  Top w0.152: D117.2 7.828,31.942 D118.1 7.892,31.752 7.892,31.158 C278.2
NetC280_1: C280.1 D117.1 R412.1 | length 19.7
  Top w0.152: D117.1 6.278,33.582 6.719,33.142 8.406,33.142 8.788,33.524 8.788,34.052 9.139,34.403 11.993,34.403 13.213,33.184 21.036,33.184 21.29,32.93 21.29,32.447 21.633,32.104 R412.1 22.077,31.523 C280.1
NetD112_1: D112.1 D113.1 D114.3 | length 12
  Top w0.152: v1(4.577,25.157) 4.881,24.853 v1(13.721,24.853)
  Bot w0.152: v1(4.577,25.157) 4.577,25.687 D112.1 ; v1(13.721,24.853) 13.721,25.419 D113.1 D114.3
NetD112_2: D112.2 RL6.1 T6.3 | length 5.3
  Bot w0.152: D112.2 2.36,28.47 RL6.1 T6.3@3.96,28.89
NetD113_2: D113.2 RL7.1 T30.3 | length 19.7
  Top w0.152: v1(11.841,26.841) 14.504,26.841 14.568,26.905 15.468,26.905 15.989,26.385 17.745,26.385 18.851,27.491 v1(18.851,27.864) ; v1(18.826,29.704) 19.241,30.119 20.94,30.119 21.274,29.785 21.712,29.785 22.022,30.095 23.195,30.095 23.75,30.65 T30.3
  Bot w0.152: D113.2 11.36,26.36 v1(11.841,26.841) 11.841,28.041 RL7.1 ; v1(18.826,29.704) 18.826,27.889 v1(18.851,27.864)
NetIC91_5: IC91.5 R389.1 | length 5.9
  Bot w0.152: IC91.5 24,18.1 24.15,17.95 24.579,17.95 25.1,17.429 25.32,17.429 25.448,17.3 25.807,17.3 26.095,17.011 26.905,17.011 27.039,17.145 27.039,17.4 27.609,17.97 R389.1
NetIC91_6: IC91.6 R394.1 | length 1.4
  Bot w0.254: IC91.6 24.95,19.92 R394.1
NetIC93_4: IC93.4 R393.1 | length 31.4
  Top w0.152: v1(30.028,8.4) 32.993,8.4 33.482,8.889 33.482,11.13 34.357,12.005 35.298,12.005 35.867,12.573 35.867,12.608 36.179,12.92 36.568,12.92 37.329,13.681 37.329,23.49 36.385,24.433 v1(36.167,24.433) ; R393.1 34.7,27.231 35.825,26.106 v1(35.943,26.106) v1@35.943,26.181
  Top w0.254: IC93.4 27.843,9.257 28,9.1 v1(28,9)
  Bot w0.152: v1(35.943,26.106) 35.943,26.109 36.1,26.267 36.167,26.2 v1(36.167,24.433)
  Bot w0.254: v1(28,9) 29.428,9 v1(30.028,8.4)
NetIC93_5: IC93.5 R395.1 | length 1.6
  Top w0.152: IC93.5 31.993,9.257 32.22,9.03 R395.1
NetIC96_2: IC96.2 R401.2 R409.2 | length 18.8
  Top w0.152: R409.2 17.416,32.473 IC96.2 15.041,32.473 14.864,32.295 14.864,30.837 15.336,30.364 18.318,30.364 18.377,30.423 21.383,30.423 v1(21.493,30.314) ; v1(20,25.157) 20,26.408 20.198,26.605 20.198,26.961 20.045,27.113 v1(20.02,27.113)
  Bot w0.152: R401.2 v1(20,25.157) ; v1(20.02,27.113) 20.198,27.113 20.746,27.661 20.819,27.661 21.849,28.691 21.849,29.958 v1(21.493,30.314)
NetIC96_3: IC96.3 IC96.5 R404.2 R406.1 | length 30.5
  Top w0.152: v1(6,21.3) 3.7,23.6 3.7,31.573 4.041,31.914 5.31,31.914 5.766,32.369 5.766,34.434 5.7,34.5 5.7,34.7 6,35 6.712,35 7.4,34.312 7.4,33.8 7.496,33.704 7.496,33.581 7.63,33.447 8.279,33.447 8.483,33.65 8.483,34.178 9.37,35.065 R406.1 ; R406.1@9.314,35.165 9.466,35.013 IC96.5 12.755,35.013 14.025,33.743 IC96.3
  Bot w0.152: v1(6,21.3) 6.25,21.05 R404.2
NetIC96_6: IC96.6 R411.2 R414.2 | length 17.8
  Top w0.152: R414.2 9.491,33.743 IC96.6 12.07,33.743 14.223,31.589 14.223,30.614 15.194,29.643 v1(15.194,28.409) ; v1(15.016,26.377) 15.016,23.026 16.3,21.742 v1(16.261,21.703)
  Bot w0.152: v1(15.016,26.377) 15.194,26.554 v1(15.194,28.409) ; v1(16.261,21.703) 16.3,21.664 R411.2
NetJ104_1: J104.1 RL6.2 | length 15.4
  Top w1.27: RL6.2 5.25,15.42 5.25,10.75 3.25,8.75 J104.1
NetLD30_2: LD30.2 R405.2 | length 1.6
  Top w0.152: LD30.2 30.862,34.832 R405.2
NetLD31_2: LD31.2 R408.2 | length 1.3
  Top w0.152: R408.2 36.763,10.3 LD31.2
NetR392_1: R392.1 R394.2 R396.2 | length 11.9
  Top w0.152: R392.1 23.25,12.877 23.246,12.88 23.246,14.212 23.38,14.346 24.62,14.346 25.329,15.055 25.329,16.067 25.961,16.699 25.961,18.187 25.677,18.47 v1(25.677,19.592)
  Bot w0.152: v1(25.677,19.592) 25.674,19.592 25.633,19.633 26.47,20.47 R394.2
NetR397_2: R397.2 T6.1 | length 1.2
  Bot w0.152: T6.1 7.582,29.7 R397.2
NetR398_2: R398.2 T30.1 | length 1.5
  Top w0.152: R398.2 22.53,28.33 T30.1
NetR400_2: R400.2 R401.1 | length 1.8
  Bot w0.254: R400.2 R401.1
NetR403_2: R403.2 R404.1 | length 2.5
  Bot w0.254: R403.2 5.25,16.636 5.914,17.3 R404.1
NetR410_2: R410.2 R411.1 | length 2.3
  Bot w0.254: R410.2 16.25,17.75 R411.1
NetRL6_4: RL6.4 RL7.2 | length 6.4
  Bot w1.27: RL6.4 9.56,15.6 RL7.2
P3V3: C264.2 C266.2 C271.2 C272.2 C273.2 C274.2 IC92.8 IC94.2 IC95.9 IC95.24 IC95.36 IC95.48 JP9.1 R390.2 R391.2 R399.1 TP41.1 | length 73
  Top w0.254: C264.2 v1(25.953,25.75) 26.25,26.047 IC95.24 ; v1(26,24.365) 26.035,24.4 27.273,24.4 28.128,23.545 IC94.2 ; v1(27.392,33.98) 27.975,33.98 28.055,33.9 28.25,34.095 C266.2 28.4,33.35 IC95.9 ; C274.2 28.16,20.918 IC94.2 ; v1(30.862,20.675) 30.862,19.073 JP9.1 ; IC95.36 32.831,25.719 v1@32.95,25.6 ; v1(32.8,25.6) v1@32.95,25.6 ; C272.2 v1@32.95,25.6 ; IC95.48 33.989,31.869 34.07,31.95 33.7,32.32 v1(33.7,32.6) ; v1(34.26,25.6) 35.521,25.6 35.521,25.479 35.682,25.317 36.467,25.317 36.868,25.719 v1(37,25.719) ; v1(36.8,13.9) 36.8,13.689 36.387,13.276 36.032,13.276 35.889,13.133 35.558,13.133 34.955,12.53 R390.2 33.759,12.53 33.717,12.572 33.717,12.661 33.477,12.901 33.474,12.901 32.684,13.691 32.684,14.066 32.025,14.725 IC92.8 28.785,14.725 C273.2 28.545,14.6 28.071,15.074 28.071,15.926 28.234,16.089 28.296,16.089 28.877,16.671 28.877,17.728 29.199,18.05 29.199,20.401 v1(29,20.6) 28.65,20.95 IC94.2
  Bot w0.254: v1(25.953,25.75) 26,25.703 v1(26,24.365) ; v1(27.392,33.98) 27.238,33.98 27.625,34.367 27.625,35.274 27.771,35.421 31.614,35.421 33.9,33.134 v1@33.9,32.814 ; v1(29,20.6) 30.787,20.6 v1(30.862,20.675) ; v1(32.8,25.6) v1(34.26,25.6) ; v1(33.7,32.6) 34.434,32.6 37.671,29.364 37.671,25.719 ; v1(36.8,13.9) 37.671,14.771 37.671,25.719 ; v1(37,25.719) 37.671,25.719
P5V0: C263.2 C265.2 C267.2 C268.1 C269.1 C270.2 D114.1 IC93.3 IC94.1 IC96.8 L14.2 R392.2 R408.1 RL6.5 RL7.5 | length 76.3
  Top w0.152: 4.881,29.907 5.826,28.963 ; C270.2 9.376,30.854 9.725,31.203 IC96.8 ; R392.2 C267.2@24.18,10.03 ; 24.3,22.75 24.4,22.65 C269.1 ; 25.807,20.97 25.807,20.266 25.969,20.266 26.003,20.232 26.003,20.15 26.137,20.016 26.279,19.875
  Top w0.254: 21.734,27.024 21.905,26.854 22.225,26.534 22.6,26.534 ; C268.1 24.25,22.8 24.3,22.75 C265.2 ; C267.2@24.18,10.03 C267.2@24.2,10.03 ; C267.2@24.2,10.05 C267.2 C267.2@24.5,10.1 ; IC93.3 25.327,10.527 24.83,10.03 C267.2@24.2,10.03 ; 26.279,19.875 26.279,19.519 27.45,18.347 27.45,18.321 27.1,17.971 v1(27.1,15.9) ; v1(27.4,13.7) 28.506,12.594 28.506,9.413 28.579,9.34 28.579,8.76 28.2,8.381 v1(28.2,8.2) 25.35,8.2 24.2,9.35 C267.2@24.2,10.03 ; v1(29.9,7.6) 32.9,7.6 33.989,8.689 33.989,9.689 R408.1
  Top w0.508: C263.2 4.805,30.936 4.805,29.831 ; 5.826,28.963 RL6.5@9.487,28.963 ; C270.2 9.147,30.674 9.147,29.303 RL6.5@9.487,28.963 ; v1(17.4,27.218) 16.73,27.888 16.248,27.888 ; 21.734,27.024 21.734,27.065 21.246,27.553 21.205,27.553 20.31,28.449 RL7.5 17.25,28.89 16.248,27.888 ; 22.6,26.534 23.393,26.534 23.725,26.202 ; C268.1 23.099,22.8 22.915,22.984 22.772,22.984 22.414,23.341 22.414,23.7 22.534,23.819 22.534,24.178 23.725,25.37 23.725,26.202 ; L14.2 23.5,20.05 C269.1@24.4,20.95 ; 23.543,25.206 23.566,25.183 23.754,25.37 23.754,26.173 23.725,26.202 ; C269.1 24.68,20.97 25.807,20.97 ; RL6.5@9.487,28.963 RL6.5 10.89,30.22 11.445,30.22 11.522,30.296 13.858,30.296 14.254,29.901 14.254,28.332 14.884,27.702 16.062,27.702 16.248,27.888
  Bot w0.152: RL6.5@8.9,28.23 RL6.5 RL6.5@10.163,28.89 ; D114.1 v1(17.4,27.218)
  Bot w0.254: v1(27.1,15.9) 27.1,14 v1(27.4,13.7) ; v1(28.2,8.2) 28.859,8.2 29.079,8.421 v1(29.9,7.6)
P12V0: D109.2 D110.1 J103.1 | length 15.4
  Top w0.254: D109.2 23.212,3.61 J103.1
  Top w0.508: J103.1 26.226,3 33.75,3 34.1,3.35 D110.1
REL1: IC95.19 R397.1 | length 23.7
  Top w0.152: v1(7.701,28.256) 8.59,27.367 11.62,27.367 11.793,27.54 14.364,27.54 14.684,27.22 15.585,27.22 16.115,26.69 17.619,26.69 18.323,27.394 18.323,28.083 18.632,28.392 19.07,28.392 19.081,28.381 19.801,27.661 20.219,27.661 20.953,26.927 v1(20.953,26.847) ; v1(23.552,28.028) 23.552,28.834 23.443,28.943 23.925,29.425 25.185,29.425 25.742,28.869 IC95.19
  Bot w0.152: R397.1 7.625,28.332 v1(7.701,28.256) ; v1(20.953,26.847) 22.371,26.847 v1(23.552,28.028)
REL2: IC95.20 R398.1 | length 3.2
  Top w0.152: R398.1 23.522,27.25 24.143,27.871 25.095,27.871 25.592,28.369 IC95.20
RESETn: IC95.7 JP9.10 R399.2 | length 24.3
  Top w0.152: IC95.7 29.546,32.665 29.546,32.94 29.797,33.191 29.797,33.803 29.505,34.095 29.187,34.095 29.079,34.204 28.78,34.204 28.646,34.338 28.646,35.327 28.791,35.471 31.635,35.471 37.529,29.577 37.529,25.5 37.219,25.19 36.842,25.19 36.614,24.962 35.948,24.962 35.638,24.652 35.638,24.63 R399.2@35.259,24.63 ; R399.2 R399.2@35.259,24.63 ; JP9.10 36.265,23.376 35.259,24.382 R399.2@35.259,24.63
Rx: IC95.13 TP37.1 | length 2.9
  Top w0.152: v1(25.523,32.373) 25.523,31.869 IC95.13
  Bot w0.152: TP37.1@25.178,31.078 25.178,32.373 v1(25.523,32.373)
SCL1: IC92.6 IC95.21 R391.1 | length 23.2
  Top w0.152: IC95.21 25.523,27.869 25.221,27.567 24.693,27.567 24.2,27.073 24.2,26.409 24.32,26.29 24.32,25.219 24.645,24.894 26.219,24.894 26.357,24.756 27.665,24.756 28.657,23.764 28.657,21.838 29.56,20.934 29.56,17.854 29.233,17.526 29.233,16.025 IC92.6 ; IC92.6@30.7,16.125 31.723,16.125 32.229,15.619 32.229,15.193 32.955,14.467 33.271,14.467 33.9,13.838 R391.1
SDA1: IC92.5 IC95.22 R390.1 | length 22.4
  Top w0.152: IC95.22 25.612,27.369 25.505,27.262 24.832,27.262 24.625,27.055 24.625,25.345 24.772,25.198 26.345,25.198 26.483,25.06 27.791,25.06 28.961,23.89 28.961,21.965 29.865,21.061 29.865,17.787 29.895,17.757 29.895,17.385 30.211,17.069 IC92.5 ; IC92.5@30.7,16.775 31.504,16.775 32.771,15.507 32.771,15.081 33.081,14.771 34.306,14.771 34.9,14.178 R390.1
SWCLK: IC95.37 JP9.4 | length 4.8
  Top w0.152: JP9.4 32.455,23.505 33.111,24.161 33.355,24.161 33.489,24.295 33.489,25.193 33.427,25.255 33.427,25.945 33.526,26.045 33.526,26.369 IC95.37
SWDIO: IC95.34 JP9.2 | length 3.1
  Top w0.254: JP9.2@30.985,22.85 30.985,24.066 31.461,24.541 31.461,25.658 IC95.34
Tx: IC95.12 TP36.1 | length 2.8
  Top w0.152: v1(26,33.1) 26,33.062 25.956,33.019 26.456,32.519 IC95.12
  Bot w0.152: v1(26,33.1) 26.165,32.935 26.165,32.574 TP36.1
UMEAS1: J104.4 R400.1 RL7.4 | length 12
  Bot w0.254: R400.1 20,13.96 RL7.4
  Bot w1.27: J104.4 18.25,10 18.705,10.455 18.705,11.52 19.545,12.361 19.545,12.885 RL7.4
UMEAS2: J104.3 R410.1 RL7.3 | length 10.5
  Bot w0.254: RL7.3 12.69,12.9 13.35,13.56 R410.1
  Bot w1.27: RL7.3 13.25,10.55 J104.3
UMEAS_COM: J104.2 R403.1 RL6.3 | length 12.5
  Bot w0.152: RL6.3 3.38,12.55 R403.1
  Bot w1.27: RL6.3 2.64,11.11 J104.2
pads on no net: D114.2 IC95.1 IC95.3 IC95.4 IC95.5 IC95.6 IC95.14 IC95.15 IC95.16 IC95.17 IC95.18 IC95.25 IC95.26 IC95.27 IC95.28 IC95.29 IC95.31 IC95.38 IC95.39 IC95.41 IC95.42 IC95.43 IC95.44 JP9.6 JP9.7 JP9.8

## Polygon pours and split planes (outlines as drawn)
GND on Bot "Signal Layer 1-No Net 1" (solid, remove dead copper, pour order 0): 6.2,35.8 6.3,35.7 31.8,35.7 38,29.5 38,2.7 37.95,2.7 35.25,0 21.5,0 21.5,10.7 22.1,11.3 22.1,23.9 0.1,23.9 0.1,29.564 6.2,35.664

## Keep-outs
KeepOutLayer:
  lines w0.1: 0,2.9 0,29.464 6.286,35.75 31.75,35.75 38,29.5 38,2.75 35.25,0 2.9,0 0,2.9
  lines w0.254: 21.5,18.933 21.8,17.567
  lines w0.508: 0.6,21 2.75,21 5,18.75 8.25,18.75 ; 1.046,7.86 1.046,4.845 2.191,3.7 18.984,3.7 20.096,4.812 20.096,7.606 20.096,9.904 ; 10.75,4.25 10.75,8 7.5,11.25 7.5,15.25 8.25,16 8.25,18.75 ; 17.75,19.25 14.75,19.25 ; 18,18 21.65,18 21.65,14.75 22.2,14.2 22.2,13.1 21.8,12.7 21.8,11.8 20,10 ; 21.4,22.75 19,22.75 18,21.75 18,14 18.25,13.75 18.25,12.897 17.103,11.75 15.5,11.75 14.8,12.45 14.8,16.7 14.5,17 14.5,19 14.75,19.25 ; 21.5,18.933 21.5,23.7 ; 8.25,18.75 10.5,21 13.25,21 14.75,19.5 14.75,19.25

## Silkscreen, mask and mechanical layers (free items; w line width, h text height)
TopOverlay:
  text "MEAS" at 2.722,0.443 h1.2
  text "COM" at 11.46,0.24 h1.2
  text "P" at 23.144,0.24 h1.2
  text "H" at 25.684,0.24 h1.2
  text "L" at 28.732,0.24 h1.2
  text "G" at 31.018,0.24 h1.2
BottomOverlay:
  text "Tx" at 25.4,33.1 h1.52
  text "GND" at 29.6,33.04 h1.52 r180
  text "Rx" at 23.4,30.6 h1.52
  text "Vcc" at 37.5,26.8 h1.52 r90
  text "U+" at 31.8,23.6 h1.52
  text "U-" at 27.8,22.8 h1.52
  text "Shutter" at 25.9,10.6 h1.52
  text "CTRL STM" at 25.5,8.412 h1.52
  text "v1.0" at 25.5,6.5 h1.52
Mechanical1:
  lines w0.254: 27.5,35.75 10.25,35.75 6.25,35.75 0,29.5 0,2.75 2.75,0 35.25,0 38,2.75 38,29.5 31.75,35.75 27.5,35.75 ; 27.5,35.75 27.5,35.75 ; 7.75,35.75 7.75,35.75

## Text inside footprints (layer, text, board x,y; h text height)
J103: TopOverlay "3" at 29.113,6.59 h1; TopOverlay "2" at 26.573,6.59 h1; TopOverlay "1" at 24.287,6.59 h1; TopOverlay "4" at 31.653,6.59 h1
J104: TopOverlay "1" at 3,-0.425 h1.2; Mechanical14 "1" at 1.3,7.175 h1.2